# Altium PCB Remove_Motor.PcbDoc
Units mil, origin at the board's own origin, x right, y up, seen from the top; angles counter-clockwise.
Board outline 2285 x 1200 mil, 2 copper layers (Top Layer, Bottom Layer); 17 components, 48 nets, 58 pads, 0 vias.
Unrouted connection lines stored in the file: 28.
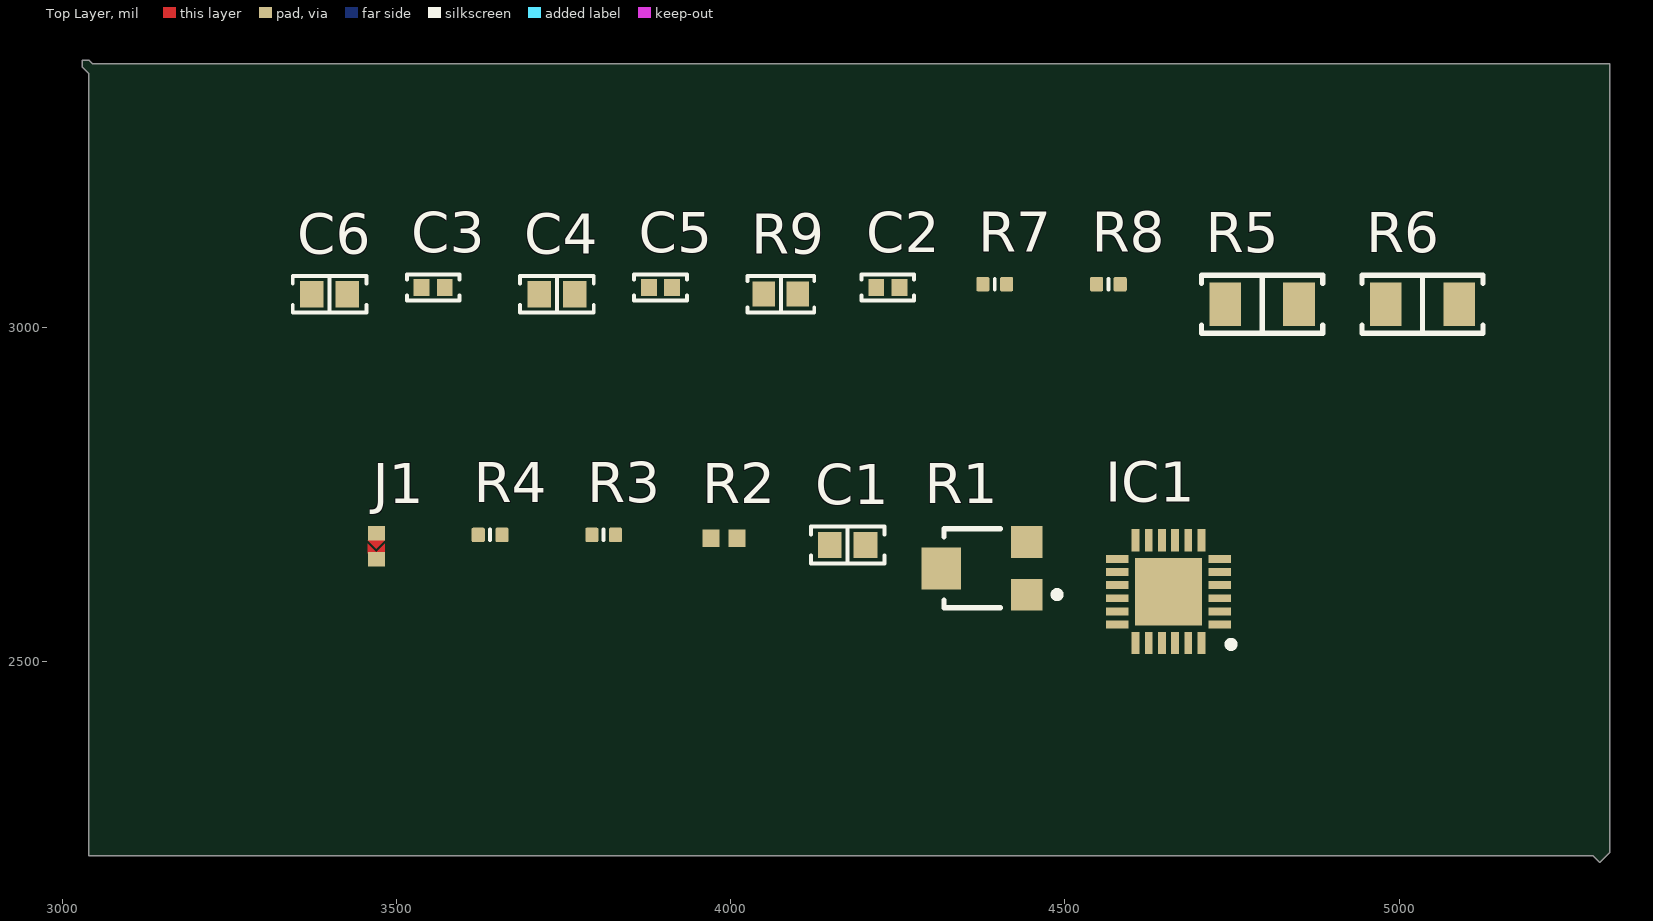
[diagram p0: Top Layer view]
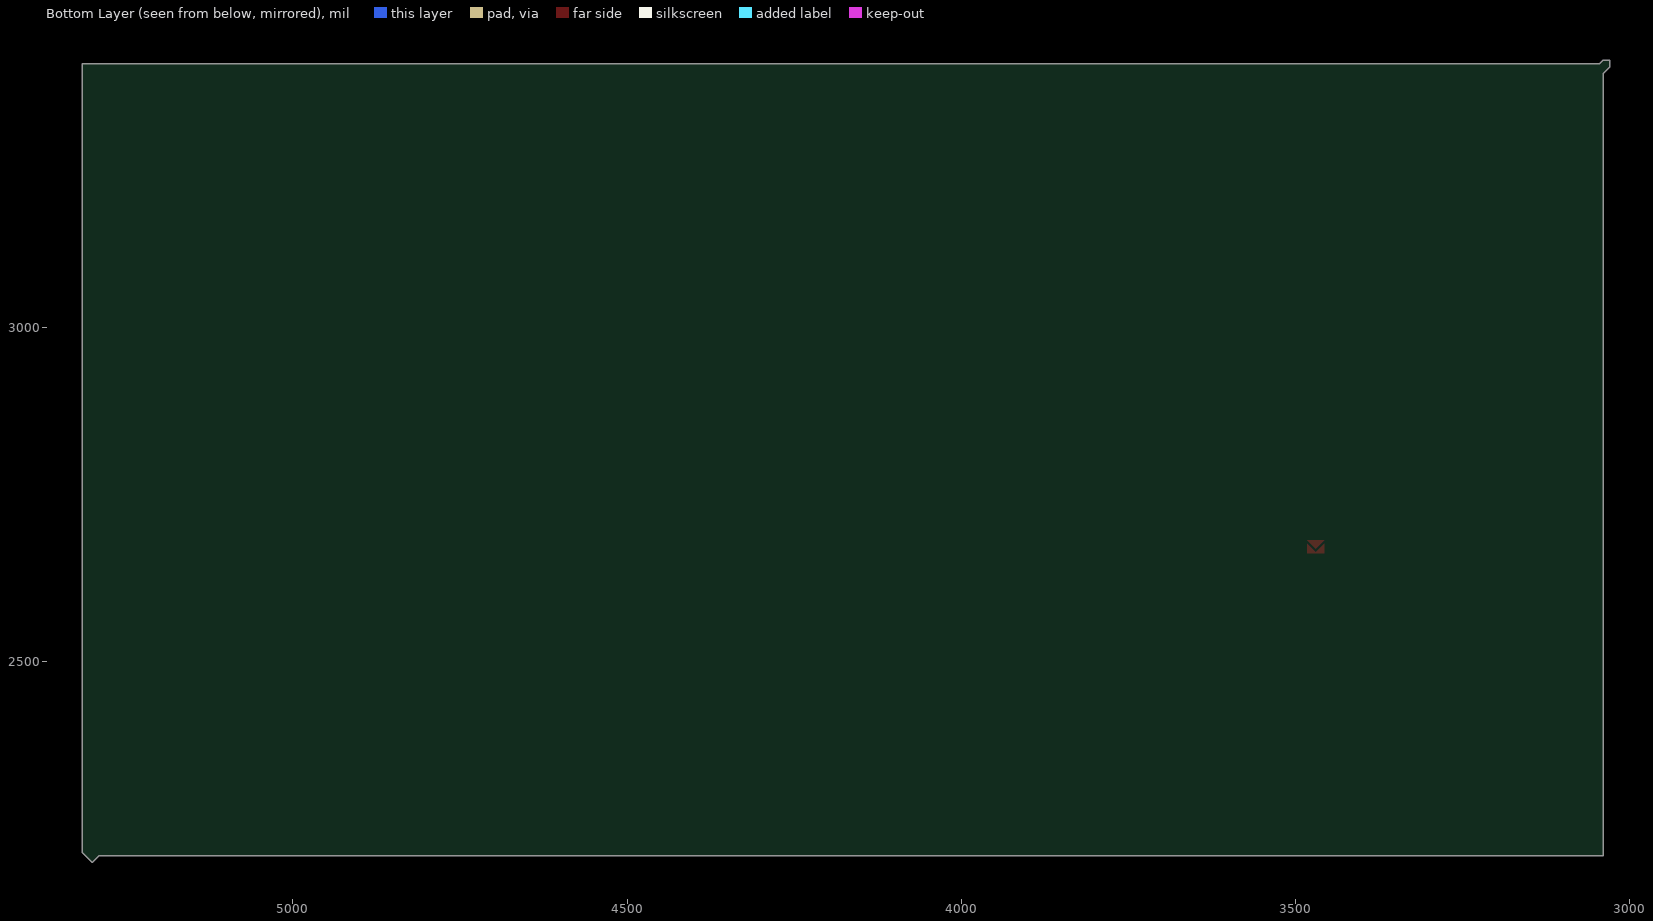
[diagram p1: Bottom Layer view, seen from below]

## Layer stack, top to bottom
Top Solder: solder mask 0.4, Solder Resist, Dk 3.5
Top Layer: signal copper 1.4
Dielectric 1: dielectric 12.6, FR-4, Dk 4.8
Bottom Layer: signal copper 1.4
Bottom Solder: solder mask 0.4, Solder Resist, Dk 3.5

## Board outline
3040,3400 3045,3395 5315,3395 5315,2215 5300,2200 5290,2210 3040,2210 3040,3380 3030,3390 3030,3400

## Design rules (kind name [scope] priority, off if disabled: settings)
Clearance [All] p1: gap=10 ignorepadtopadclearanceinfootprint=TRUE except(0: Arc-Hole Track-Hole SMDPad-Hole THPad-Hole Via-Hole Fill-Hole Poly-Hole Region-Hole Text-Hole)
MinimumSolderMaskSliver [All] p1: minsoldermaskwidth=1
PolygonConnect [All] p1: connectstyle=Relief reliefconductorwidth=10 reliefentries=4 polygonreliefangle="90 Angle" airgapwidth=10
RoutingVias [All] p1: holewidth=28 width=50 viastyle="Through Hole" minholewidth=28 minwidth=50 maxholewidth=28 maxwidth=50
SilkToSilkClearance [All] p1: silktosilkclearance=3
SilkToSolderMaskClearance [IsPad] p1: minsilkscreentomaskgap=3 clearancetoexposedcopper=TRUE
SolderMaskExpansion [All] p1: expansion=4 istentingtop=FALSE
Width [All] p1: maxlimit=10 minlimit=10 preferedwidth=10
27 further rules are at their usual default settings.

## Components (designator, comment, footprint, x,y, rotation, side; value= is the part's Value field where it differs from the comment)
C1 "06031C103K4T2A" "CAP 0603_1608" 4175,2675 r180 top value=10n
C2 "0402YD475MAT2A" "CAP 0402_1005" 4235,3060 r180 top value=4.7u
C3 "0402ZD225MAT2A" "CAP 0402_1005" 3555,3060 r180 top value=10u
C4 "06031C103K4T2A" "CAP 0603_1608" 3740,3050 r180 top value=10n
C5 "0402ZD225MAT2A" "CAP 0402_1005" 3895,3060 r180 top value=10u
C6 "06031C103K4T2A" "CAP 0603_1608" 3400,3050 r180 top value=10n
IC1 "DRV8834RGET" QFN50P400X400X100-25N-D 4655,2605 r180 top
J1 "JUMPER" JUMPER 3470,2675 r180 top
R1 "35WR10KLFTR" BI-35WR10KLFTR-3_V 4380,2640 r180 top value=10k
R2 "Resistor 10k +/-1% 0402 100 mW" RESC1005X40X25ML05T05 3990,2685 r180 top value=10k
R3 "Resistor 1K6 +/-5 % 0402 63 mW" RESC0402(1005)_L 3810,2690 r180 top value=1.6k
R4 "Resistor 47K5 +/-1 % 0402 63 mW" RESC0402(1005)_L 3640,2690 r180 top value=47.5k
R5 "0.1 ohm" "RES 1206_3216" 4795,3035 r180 top value=0.1
R6 "0.1 ohm" "RES 1206_3216" 5035,3035 r180 top value=0.1
R7 "Resistor 47K5 +/-1 % 0402 63 mW" RESC0402(1005)_L 4395,3065 r180 top value=47.5k
R8 "Resistor 47K5 +/-1 % 0402 63 mW" RESC0402(1005)_L 4565,3065 r180 top value=47.5k
R9 "1 ohm" "RES 0603_1608" 4075,3050 r180 top value=1

## Footprints (in the part's own frame and the unit in brackets; to place one, negate y for a bottom-side part, rotate by r counter-clockwise, add the part's x,y. Pads: shape width x height; smd on the part's side, far side on the other; paste and mask are expansions set on the pad)
BI-35WR10KLFTR-3_V [mm] "SMD, 3-Leads, Body 3x3.1mm"
  rect 1.2x1.2 smd: 1(-1.6,1) 3(-1.6,-1)
  rect 1.5x1.6 smd: 2(1.65,0)
  silkscreen extent -2.88,-1.5 1.55,1.5, body extent -1.55,-1.5 1.55,1.5, height 1.8
"CAP 0402_1005" [mm] "Chip Capacitor, 2-Leads, Body 1.02x0.51mm, IPC Medium Density"
  rect 0.6x0.64 smd: 1(-0.44,0) 2(0.44,0)
  silkscreen extent -1,-0.5 1,0.5, body extent -0.5,-0.26 0.5,0.26, height 0.52
"CAP 0603_1608" [mm] "Chip Capacitor, 2-Leads, Body 1.60x0.80mm, IPC Medium Density"
  rect 0.9x1 smd: 1(-0.675,0) 2(0.675,0)
  silkscreen extent -1.4,-0.7 1.4,0.7, body extent -0.8,-0.41 0.8,0.41, height 0.82
JUMPER [mm]
  rect 0.65x0.55 smd paste-2.54 mask-2.54: 1(0,-0.45) 2(0,0.55)
  Top Layer region: -0.325,-0.175 0.003,0.152 0.325,-0.175
  Top Layer region: -0.325,-0.041 0,0.284 0.325,-0.041 0.325,0.318 -0.325,0.317
QFN50P400X400X100-25N-D [mm]
  rect 0.85x0.3 smd: 1(-1.95,1.25) 2(-1.95,0.75) 3(-1.95,0.25) 4(-1.95,-0.25) 5(-1.95,-0.75) 6(-1.95,-1.25) 13(1.95,-1.25) 14(1.95,-0.75) 15(1.95,-0.25) 16(1.95,0.25) 17(1.95,0.75) 18(1.95,1.25)
  rect 0.3x0.85 smd: 7(-1.25,-1.95) 8(-0.75,-1.95) 9(-0.25,-1.95) 10(0.25,-1.95) 11(0.75,-1.95) 12(1.25,-1.95) 19(1.25,1.95) 20(0.75,1.95) 21(0.25,1.95) 22(-0.25,1.95) 23(-0.75,1.95) 24(-1.25,1.95)
  rect 2.55x2.55 smd: 25(0,0)
  silkscreen extent -2.5,1.88 -2.25,2.12, body extent -2.05,-2.05 2.05,2.05, height 1
"RES 0603_1608" [mm] "Chip Resistor, 2-Leads, Body 1.60x0.80mm, IPC Medium Density"
  rect 0.85x0.95 smd: 1(-0.65,0) 2(0.65,0)
  silkscreen extent -1.27,-0.7 1.27,0.7, body extent -0.8,-0.4 0.8,0.4, height 0.45
"RES 1206_3216" [mm] "Chip Resistor, 2-Leads, Body 3.13x1.55mm, IPC Medium Density"
  rect 1.2x1.65 smd: 1(-1.4,0) 2(1.4,0)
  silkscreen extent -2.3,-1.1 2.3,1.1, body extent -1.57,-0.8 1.62,0.8, height 0.6
RESC0402(1005)_L [mm] "Chip Resistor, Body 1.0x0.5mm, IPC High Density"
  rrect25% 0.5x0.55 smd: 1(-0.45,0) 2(0.45,0)
  silkscreen extent 0,-0.2 0,0.2, body extent -0.5,-0.25 0.5,0.25, height 0.3
RESC1005X40X25ML05T05 [mm] "Chip Resistor, 2-Leads, Body 1.05x0.55mm, IPC Low Density"
  rect 0.65x0.65 smd: 1(-0.5,0) 2(0.5,0)
  body extent -0.53,-0.28 0.53,0.28, height 0.4

## Part data
C1: "Capacitor 0.01uF", Manufacturer_Name=AVX, Mouser Part Number=581-06031C103K4T2A, Arrow Part Number=06031C103K4T2A, Arrow Price/Stock=https://www.arrow.com/en/products/06031c103k4t2a/avx, Datasheet Link=http://www.mouser.com/catalog/supplier/library/pdf/AVXSurfaceMountCeramic.pdf, Height=0.9mm, MANUFACTURER_PART_NUMBER=06031C103K4T2A, Mouser Price/Stock=https://www.mouser.com/Search/Refine.aspx?Keyword=581-06031C103K4T2A
C2: "Capacitor 4.7uF", Manufacturer_Name=AVX, Mouser Part Number=581-0402YD475MAT2A, Supplier Part Number 1=478-10788-1-ND, Arrow Part Number=0402YD475MAT2A, Datasheet Link=http://www.mouser.com/catalog/supplier/library/pdf/AVXSurfaceMountCeramic.pdf, Height=0.56mm, MANUFACTURER_PART_NUMBER=0402YD475MAT2A, Mouser Price/Stock=https://www.mouser.co.uk/ProductDetail/AVX/0402YD475MAT2A?qs=s6nfgz3miVxwCmHE9M6tUg%3D%3D, Supplier 1=Digi-Key
C3 C5: "Capacitor 10uF", Manufacturer_Name=AVX, Mouser Part Number=581-0402ZD225MAT2A, Supplier Part Number 1=445-7486-1-ND, Arrow Part Number=0402ZD225MAT2A, Arrow Price/Stock=https://www.arrow.com/en/products/0402zd225mat2a/avx, Datasheet Link=http://www.mouser.com/catalog/supplier/library/pdf/AVXSurfaceMountCeramic.pdf, Height=0.56mm, MANUFACTURER_PART_NUMBER=0402ZD225MAT2A, Mouser Price/Stock=https://www.mouser.co.uk/ProductDetail/AVX/0402ZD225MAT2A?qs=ZBeOGGPQgEESIGO3bvTmzg%3D%3D, Supplier 1=Digi-Key
C4 C6: "Capacitor 0.01uF", Manufacturer_Name=AVX, Mouser Part Number=581-06031C103K4T2A, Supplier Part Number 1=478-9371-1-ND, Arrow Part Number=06031C103K4T2A, Arrow Price/Stock=https://www.arrow.com/en/products/06031c103k4t2a/avx, Datasheet Link=http://www.mouser.com/catalog/supplier/library/pdf/AVXSurfaceMountCeramic.pdf, Height=0.9mm, MANUFACTURER_PART_NUMBER=06031C103K4T2A, Mouser Price/Stock=https://www.mouser.com/Search/Refine.aspx?Keyword=581-06031C103K4T2A, Supplier 1=Digi-Key
IC1: "Integrated Circuit", Manufacturer_Name="Texas Instruments", Mouser Part Number=595-DRV8834RGET, Supplier Part Number 1=296-37691-1-ND, Arrow Part Number=DRV8834RGET, Arrow Price/Stock=https://www.arrow.com/en/products/drv8834rget/texas-instruments, Datasheet Link=http://www.ti.com/lit/ds/symlink/drv8834.pdf, Height=1mm, MANUFACTURER_PART_NUMBER=DRV8834RGET, Mouser Price/Stock=https://www.mouser.co.uk/ProductDetail/Texas-Instruments/DRV8834RGET?qs=UFc95S4Z4CavAnnExp%2F5Mg%3D%3D, Supplier 1=Digi-Key
J1: library part CMP-009-00061-1, Pins=2
R1: library part CMP-009-00041-1, "3 mm Single-Turn Open Frame Surface Mount Cermet Trimming Potentiometer, +/- 25%, 35 W, -40 to 125 degC, 3-Pin SMD, RoHS, Tape and Reel", MANUFACTURER="BI Technologies", Max Operating Temperature=125°C, Min Operating Temperature=-40°C, Package Description="3-Pin Surface Mount Device, Body 3 x 3.1 mm", Package Quantity=2000, Power=100mW, Resistance=10k, Tolerance=25%, Voltage Rating=50V, Case/Package=35WR10KLFTR, Composition=Potentiometer, Datasheet URL=http://www.bitechnologies.com/pdfs/35.pdf, Datasheet Version=Feb-10, Manufacturer URL=http://www.bi-technologies.net/, Mounting Technology=SM, Package Reference=35WR10KLFTR, Packaging=TapeandReel, RoHS Compliant=True, Set Position=.5
R2: library part CMP-009-00015-4, "Chip Resistor, 10 KOhm, +/- 1%, 0.1 W, -55 to 155 degC, 0402 (1005 Metric)", Case/Package=0402, Max Operating Temperature=155°C, Min Operating Temperature=-55°C, Power=100mW, Tolerance=1%, Voltage Rating=50V, Mounting Technology=SM, Pins=2, RoHS Compliant=True
R3: library part CMP-009-00160-2, "Chip Resistor, 1,6 kOhms, +/-5 %, 63 mW, -55 to 155 degC, 0402", Case/Package=0402, Max Operating Temperature=155°C, Min Operating Temperature=-55°C, Power=63mW, Tolerance=5%, Pins=2
R4 R7 R8: library part CMP-009-00137-2, "Chip Resistor, 47,5 kOhms, +/-1 %, 63 mW, -55 to 155 degC, 0402", Case/Package=0402, Max Operating Temperature=155°C, Min Operating Temperature=-55°C, Power=63mW, Tolerance=1%, Pins=2
R5 R6: library part ".1 ohm RES", Supplier Part Number 1=WSLC-.10CT-ND, Supplier 1=Digi-Key, Supplier 2=Digi-Key, Supplier Part Number 2=P.10AUDKR-ND
R9: library part "1 ohm RES", Supplier Part Number 1=541-1.00HCT-ND, Supplier 1=Digi-Key

## Nets (pads, with @x,y where several pads share a name; then routed paths per layer and width w, separated by ;. In a path a pad name is that pad's centre, name@x,y a point inside that pad or via, vN(x,y) a via of type N, cw(c..) or ccw(c..) an arc to the next point about the centre after c; other vN are vias at no path point)
5V: 
GND: C2.2 C6.2 IC1.18 IC1.25 R1.1 R5.1 R6.1 R7.2 R8.2
MOS_D: 
MOS_S: 
NetA4988_1A: 
NetA4988_1B: 
NetA4988_2A: 
NetA4988_2B: 
NetA4988_DIR: 
NetA4988_MS1: 
NetA4988_MS2: 
NetA4988_MS3: 
NetA4988_RESET: 
NetA4988_STEP: 
"NetButtons connector_1": 
"NetButtons connector_2": 
NetC1_1: C1.1 C3.1 C4.1 IC1.15 IC1.16
NetC1_2: C1.2 IC1.14
NetC2_1: C2.1 IC1.17 R4.1
NetC5_1: C5.1 R9.2
NetFocus_led_2: 
NetIC1_1: IC1.1
NetIC1_2: IC1.2 R6.2
NetIC1_3: IC1.3
NetIC1_4: IC1.4
NetIC1_5: IC1.5 R5.2
NetIC1_6: IC1.6
NetIC1_7: IC1.7
NetIC1_8: IC1.8
NetIC1_9: IC1.9
NetIC1_10: IC1.10
NetIC1_11: IC1.11
NetIC1_12: IC1.12 J1.2 R4.2
NetIC1_13: IC1.13 R3.1
NetIC1_19: IC1.19 IC1.20 R1.2
NetIC1_21: IC1.21 R1.3
NetIC1_22: IC1.22 R2.1
NetIC1_23: IC1.23 R8.1
NetIC1_24: IC1.24 R7.1
NetJ1_1: J1.1
"NetLED Regulator_4": 
"NetLimit Switch_1": 
NetMETRO_MINI_6: 
NetMOSFET_R_2: 
NetON-OFF-SWITCH_1: 
NetON-OFF-SWITCH_2: 
NetR2_2: R2.2 R3.2
VBAT: 
pads on no net: C3.2 C4.2 C5.2 C6.1 R9.1